# Altium PCB medibox.PcbDoc
Units mm, origin at the board's own origin, x right, y up, seen from the top; angles counter-clockwise.
Board outline 100.33 x 80.01 mm, 4 copper layers (Top Layer, GND, PWR MIX, Bottom Layer), stack 0.603 mm thick; 31 components, 21 nets, 105 pads, 16 vias.
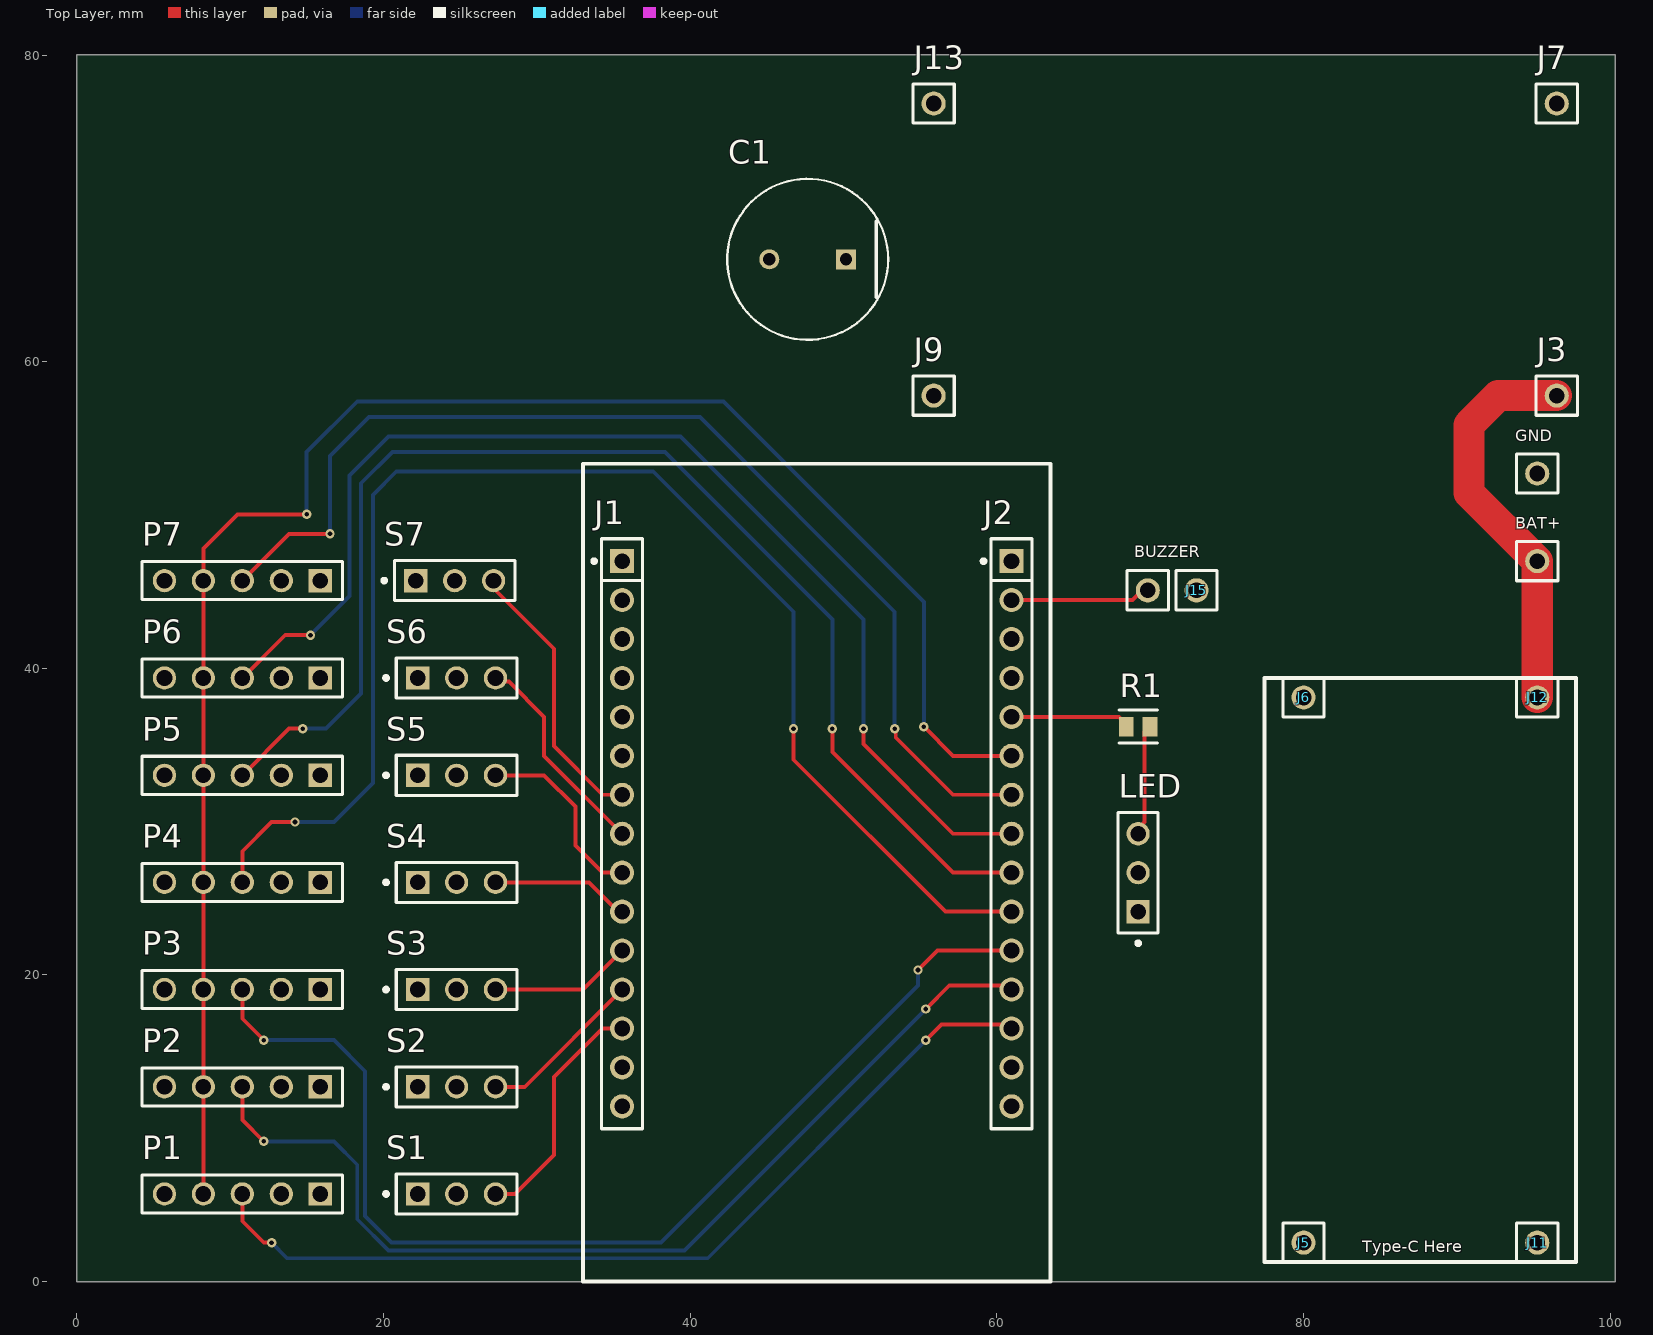
[diagram p0: Top Layer view]
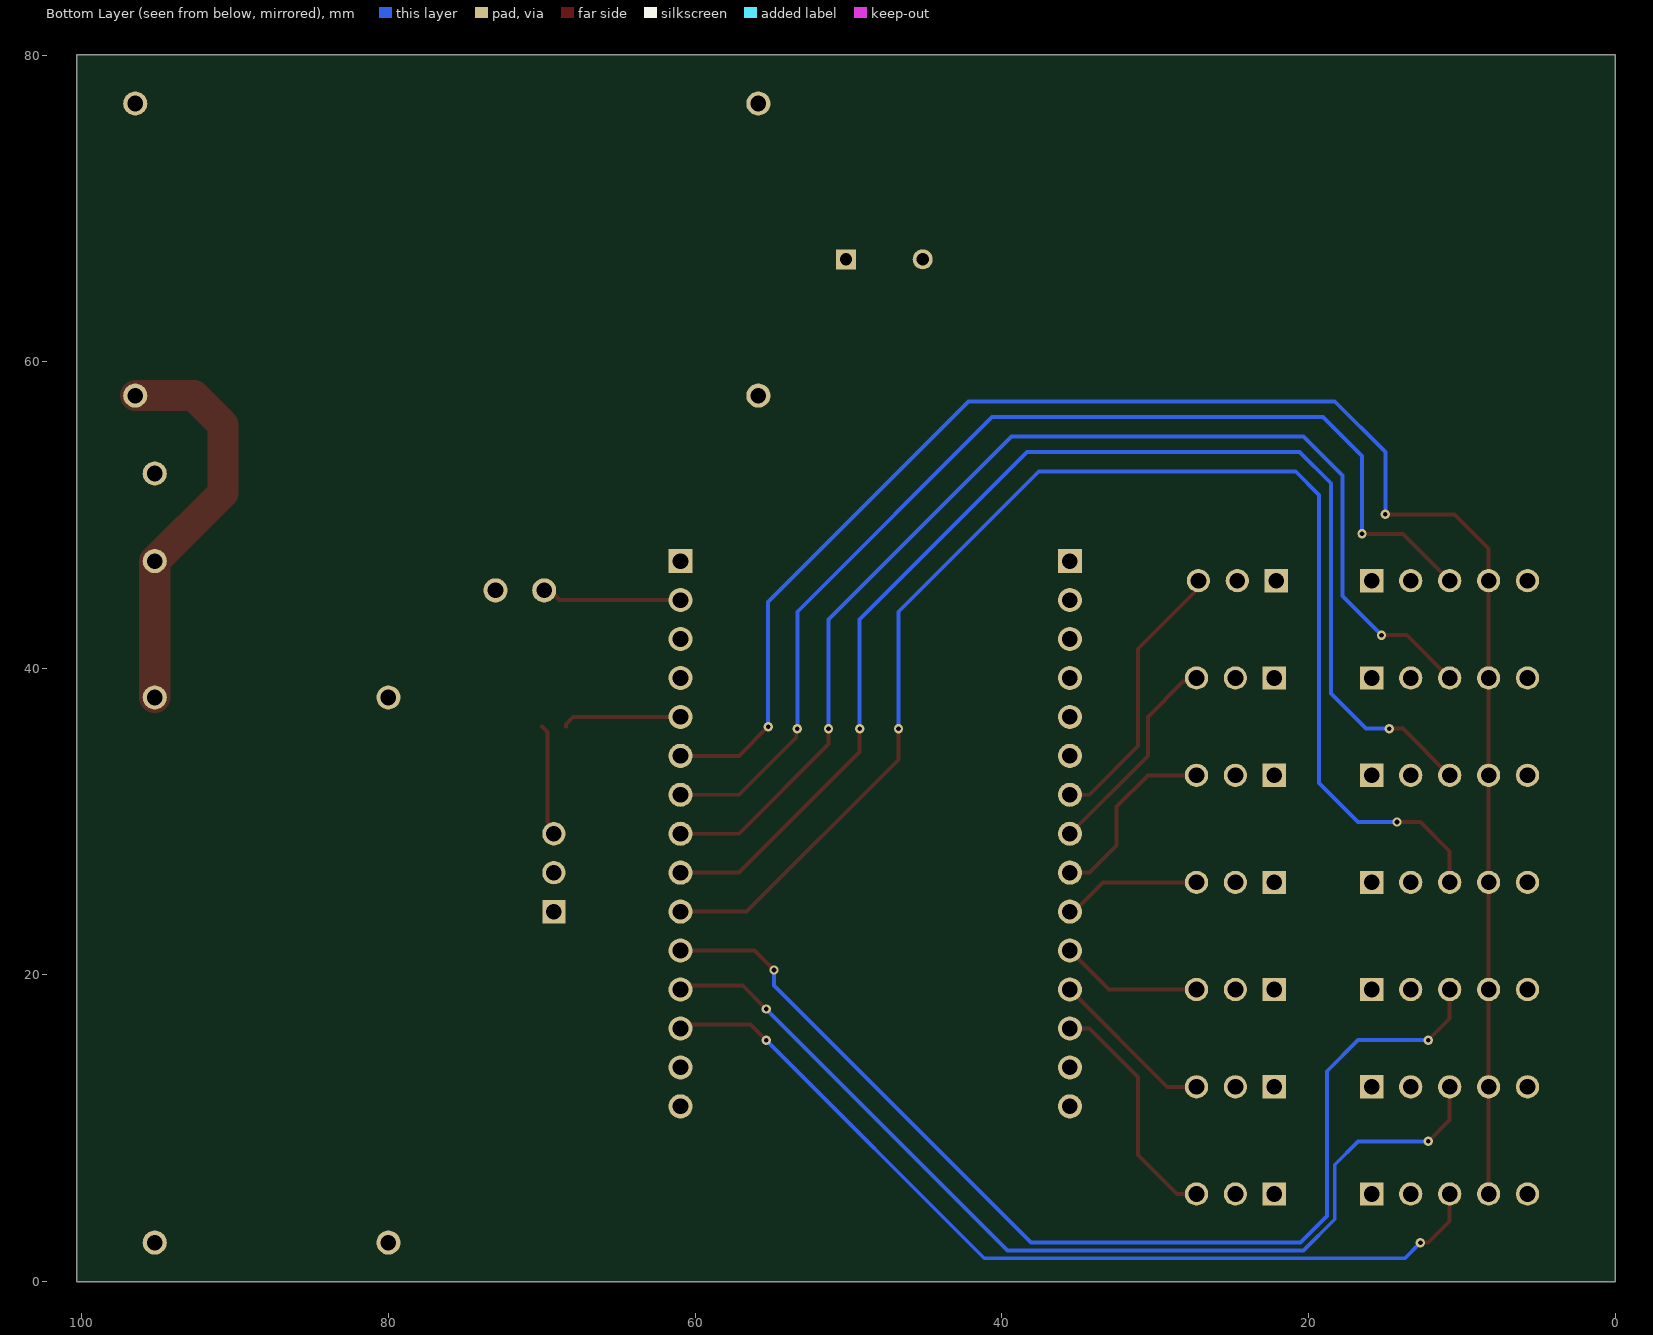
[diagram p1: Bottom Layer view, seen from below]
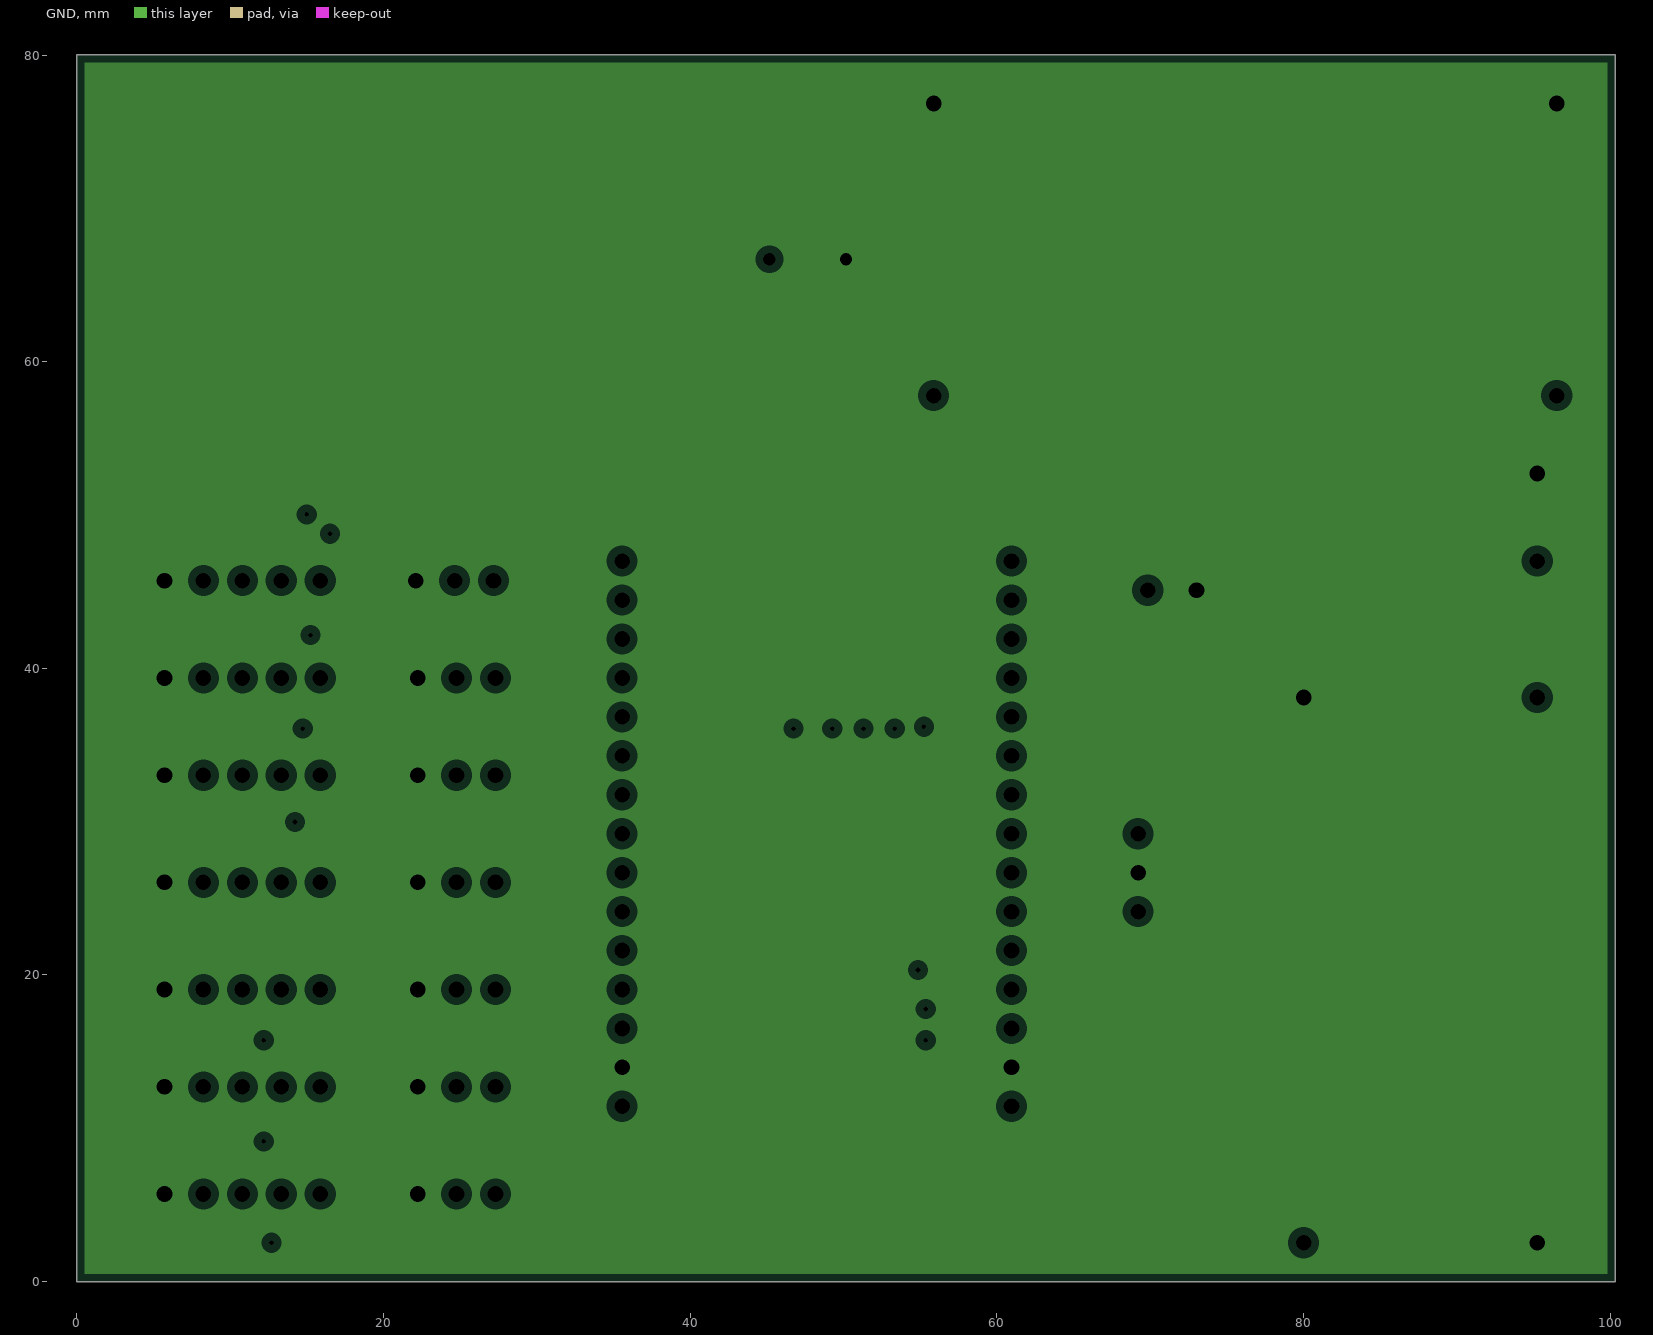
[diagram p2: GND, clearances drawn from the general rule]
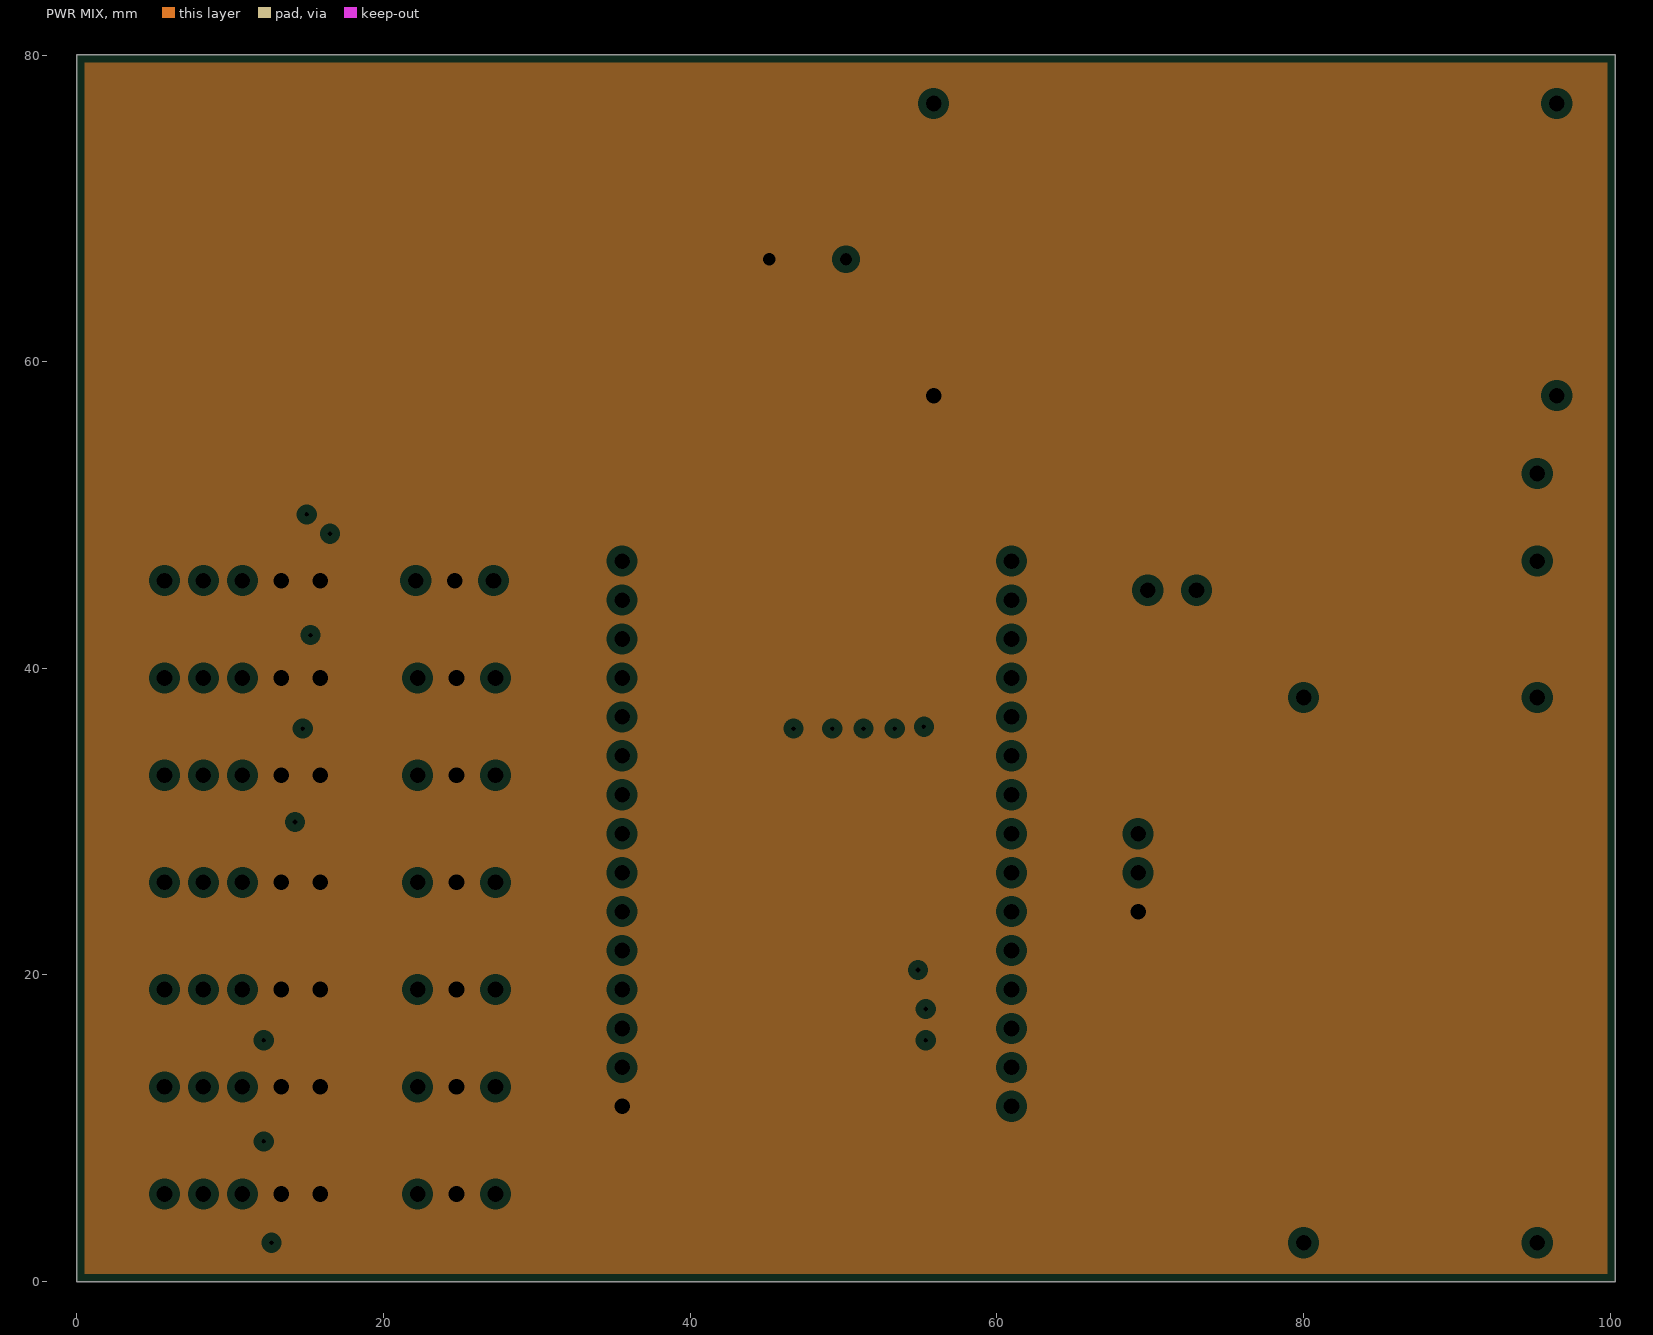
[diagram p3: PWR MIX, clearances drawn from the general rule]
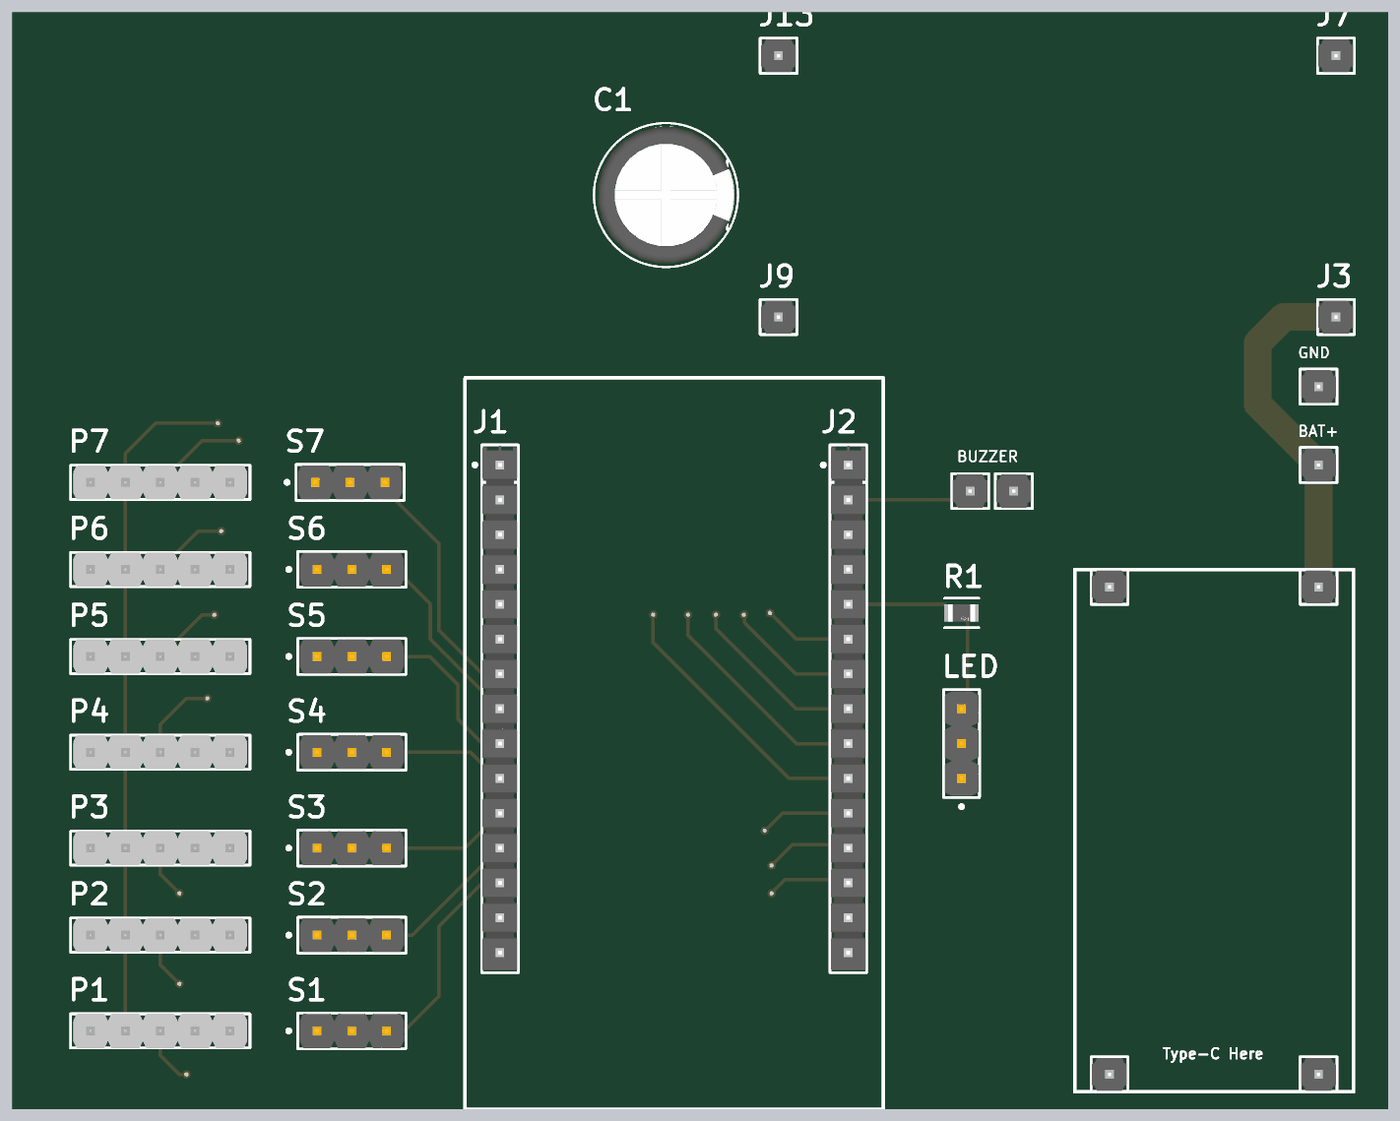
[diagram p4: 3D render of the assembled board from above, using the file's embedded part models]

## Layer stack, top to bottom
Top Solder: solder mask 0.0102, Solder Resist, Dk 3.5
Top Layer: signal copper 0.0356
Dielectric 2: prepreg 0.0711, PP-006, Dk 4.1
GND: plane copper 0.035, net GND
Dielectric 1: dielectric 0.32, FR-4, Dk 4.8
PWR MIX: plane copper 0.035, net 5V
Dielectric 3: prepreg 0.0711, PP-006, Dk 4.1
Bottom Layer: signal copper 0.0356
Bottom Solder: solder mask 0.0102, Solder Resist, Dk 3.5

## Board outline
0,0 100.33,0 100.33,80.01 0,80.01

## Design rules (kind name [scope] priority, off if disabled: settings)
Clearance [All] p1: gap=0.254 ignorepadtopadclearanceinfootprint=FALSE
PlaneClearance [All] p1: clearance=0.508
PlaneConnect [All] p1: planeconnectstyle=Relief reliefexpansion=0.508 reliefentries=4 reliefconductorwidth=0.254 reliefairgap=0.254
PolygonConnect [All] p1: connectstyle=Relief reliefconductorwidth=0.254 reliefentries=4 polygonreliefangle="90 Angle" airgapwidth=0.254
RoutingVias [All] p1: holewidth=0.305 width=0.61 viastyle="Through Hole" minholewidth=0.254 minwidth=0.508 maxholewidth=0.305 maxwidth=0.61
SolderMaskExpansion [All] p1: expansion=0 istentingtop=FALSE
SupplyNets "Schematic Supply Nets" [InNet('GND')] p1: voltage=0.000
Width 5V [(InNet('5V') OR InNet('BAT_7.4V'))] p1: maxlimit=2.032 minlimit=0.762 preferedwidth=1.524
Width [All] p2: maxlimit=0.254 minlimit=0.203 preferedwidth=0.254
28 further rules are at their usual default settings.

## Components (designator, comment, footprint, x,y, rotation, side; value= is the part's Value field where it differs from the comment)
BAT+ "68000-401HLF" FP-68000-401HLF-MFG 95.25,46.99 r0 top (schematic designator J4)
BUZZER "68000-401HLF" FP-68000-401HLF-MFG 69.85,45.085 r0 top (schematic designator J14)
C1 "1000uF" FP-RAD-TH-D_10_0_5-L_25_2-MFG 47.665,66.675 r180 top
GND "68000-401HLF" FP-68000-401HLF-MFG 95.25,52.705 r0 top (schematic designator J10)
J1 "TSW-115-23-T-S" FP-TSW-115-23-T-S-MFG 35.56,29.21 r270 top
J2 "TSW-115-23-T-S" FP-TSW-115-23-T-S-MFG 60.96,29.21 r270 top
J3 "68000-401HLF" FP-68000-401HLF-MFG 96.52,57.785 r0 top
J5 "68000-401HLF" FP-68000-401HLF-MFG 80.01,2.54 r0 top
J6 "68000-401HLF" FP-68000-401HLF-MFG 80.01,38.1 r0 top
J7 "68000-401HLF" FP-68000-401HLF-MFG 96.52,76.835 r0 top
J9 "68000-401HLF" FP-68000-401HLF-MFG 55.88,57.785 r0 top
J11 "68000-401HLF" FP-68000-401HLF-MFG 95.25,2.54 r0 top
J12 "68000-401HLF" FP-68000-401HLF-MFG 95.25,38.1 r0 top
J13 "68000-401HLF" FP-68000-401HLF-MFG 55.88,76.835 r0 top
J15 "68000-401HLF" FP-68000-401HLF-MFG 73.025,45.085 r0 top
LED "MTLW-103-07-G-S-230" FP-MTLW-103-07-G-S-230-MFG 69.215,26.67 r90 top (schematic designator J8)
P1 "MTLW-105-05-T-S-190" SMTC-MTLW-105-05-X-S-190 15.875,5.715 r180 top
P2 "MTLW-105-05-T-S-190" SMTC-MTLW-105-05-X-S-190 15.875,12.7 r180 top
P3 "MTLW-105-05-T-S-190" SMTC-MTLW-105-05-X-S-190 15.875,19.05 r180 top
P4 "MTLW-105-05-T-S-190" SMTC-MTLW-105-05-X-S-190 15.875,26.035 r180 top
P5 "MTLW-105-05-T-S-190" SMTC-MTLW-105-05-X-S-190 15.875,33.02 r180 top
P6 "MTLW-105-05-T-S-190" SMTC-MTLW-105-05-X-S-190 15.875,39.37 r180 top
P7 "MTLW-105-05-T-S-190" SMTC-MTLW-105-05-X-S-190 15.875,45.72 r180 top
R1 "330R" FP-RMCF0805-IPC_C 69.215,36.195 r0 top
S1 "MTLW-103-07-G-S-230" FP-MTLW-103-07-G-S-230-MFG 24.765,5.715 r0 top
S2 "MTLW-103-07-G-S-230" FP-MTLW-103-07-G-S-230-MFG 24.765,12.7 r0 top
S3 "MTLW-103-07-G-S-230" FP-MTLW-103-07-G-S-230-MFG 24.765,19.05 r0 top
S4 "MTLW-103-07-G-S-230" FP-MTLW-103-07-G-S-230-MFG 24.765,26.035 r0 top
S5 "MTLW-103-07-G-S-230" FP-MTLW-103-07-G-S-230-MFG 24.765,33.02 r0 top
S6 "MTLW-103-07-G-S-230" FP-MTLW-103-07-G-S-230-MFG 24.765,39.37 r0 top
S7 "MTLW-103-07-G-S-230" FP-MTLW-103-07-G-S-230-MFG 24.638,45.72 r0 top

## Footprints (in the part's own frame and the unit in brackets; to place one, negate y for a bottom-side part, rotate by r counter-clockwise, add the part's x,y. Pads: shape width x height; smd on the part's side, far side on the other; paste and mask are expansions set on the pad)
FP-68000-401HLF-MFG [mm]
  round 1.57 hole 1.02 paste-2539.97 mask+0: 1(0,0)
  silkscreen extent -1.35,-1.28 1.35,1.28, body extent -1.45,-1.38 1.45,1.38, height 0.25
FP-MTLW-103-07-G-S-230-MFG [mm]
  rect 1.52x1.52 hole 1.02 paste-2539.97 mask+0: 1(-2.54,0)
  round 1.52 hole 1.02 paste-2539.97 mask+0: 2(0,0) 3(2.54,0)
  silkscreen extent -4.72,-1.31 3.94,1.31, body extent -4.04,-1.41 4.04,1.41, height 0.25
FP-RAD-TH-D_10_0_5-L_25_2-MFG [mm]
  rect 1.3x1.3 hole 0.8 paste-2539.97 mask+0: 1(-2.5,0)
  round 1.3 hole 0.8 paste-2539.97 mask+0: 2(2.5,0)
  silkscreen extent -5.25,-5.25 5.25,5.25, body extent -5.35,-5.35 5.35,5.35, height 0.25
FP-RMCF0805-IPC_C [mm]
  rect 0.955x1.262 smd paste+0 mask+0: 1(-0.776,0) 2(0.776,0)
  silkscreen extent -1.25,-1.07 1.25,1.07, body extent -1.35,-0.77 1.35,0.77, height 0.25
FP-TSW-115-23-T-S-MFG [mm]
  rect 1.57x1.57 hole 1.02 paste-2539.97 mask+0: 1(-17.78,0)
  round 1.57 hole 1.02 paste-2539.97 mask+0: 2(-15.24,0) 3(-12.7,0) 4(-10.16,0) 5(-7.62,0) 6(-5.08,0) 7(-2.54,0) 8(0,0) 9(2.54,0) 10(5.08,0) 11(7.62,0) 12(10.16,0) 13(12.7,0) 14(15.24,0) 15(17.78,0)
  silkscreen extent -19.24,-1.95 19.24,1.34, body extent -19.34,-1.44 19.34,1.44, height 0.25
SMTC-MTLW-105-05-X-S-190 [mm] "Terminal Assembly, 1x5 Pins, Vertical, 2.54mm Pitch, Male"
  rect 1.52x1.52 hole 1.02: 1(0,0)
  round 1.52 hole 1.02: 2(2.54,0) 3(5.08,0) 4(7.62,0) 5(10.16,0)
  silkscreen extent -1.46,-1.24 11.62,1.24, body extent -1.27,-1.24 11.43,1.24, height 6.35

## Part data
BAT+ BUZZER GND J3 J5 J6 J7 J9 J11 J12 J13 J15: library part CMP-15126-126518178-1, "68000-401HLF Conn Unshrouded Header HDR 1 POS Solder ST Top Entry Thru-Hole BergStik® Bulk", Color=Black, Current Rating=3A, Insulation Resistance=5GΩ, Max Operating Temperature=125°C, Max Voltage Rating (AC)=1.5kV, Min Operating Temperature=-65°C, Voltage Rating=110V, Connector Type="Male Pin", Contact Gender=Male, Contact Material="Bronze, Nickel, Tin", Contact Mating Length=5.842mm, Contact Plating=Tin, Depth=2.41mm, Gender=Male, Height=8.79mm, Housing Color=Black, Housing Material=Thermoplastic, Lead Length=2.41mm, Lead Pitch=2.54mm, Length=2.54mm, Mating Post Length=5.84mm, Mount="Through Hole", NexarPartId=126518178, Number of Contacts=1, Number of Pins=1, Number of Positions=1, Number of Rows=1, Orientation=Straight, Packaging=Bulk, Pitch=2.54mm, Radiation Hardening=No, RoHS=Compliant, Schedule B="8535908040, 8535908040", Termination=Solder
C1: library part CMP-05427-002159-1, "EEUFC1C102B Aluminum Electrolytic Capacitors (Radial Lead Type) AEC-Q200 Qualified 1000uF ±20% 16V", Capacitance=1mF, Case/Package=Radial, ESR (Equivalent Series Resistance)=45mR, Max Operating Temperature=105°C, Min Operating Temperature=-55°C, Package Quantity=500, Ratings=AEC-Q200, Ripple Current=1.44A, Tolerance=20%, Voltage Rating=16V, Diameter=10mm, Height=25mm, Height - Seated (Max)=1.063inch, Impedance=45mR, Lead Diameter=0.6mm, Lead Pitch=5mm, Length=25mm, Life (Hours)=3000Hour, Mount="Through Hole", Packaging="Ammo Pack", Polarity=Polar, Radiation Hardening=No, RoHS Compliant=Yes, Series=FC, Termination=Radial, Voltage Rating (DC)=16V
J1 J2: library part CMP-02766-001466-1, "CONN HEADER VERT 15POS 2.54MM", Color=Black, Connector Type="Male Pin", Contact Material=Bronze, Contact Mating Length=0.23inch, Contact Plating=Tin, Contact Type="Male Pin", Gender=Male, Height=2.54mm, Housing Color=Black, Housing Material=Plastic, Lead Free="Lead Free", Length=38.1mm, Mount="Through Hole", Number of Contacts=15, Number of Positions=15, Number of Rows=1, Packaging=Bulk, Pitch=0.1inch, Radiation Hardening=No, REACH SVHC="No SVHC", RoHS Compliant=Yes, Series=TSW, Termination=Solder, Width=2.54mm
LED S1 S2 S3 S4 S5 S6 S7: library part CMP-02766-001679-1, "CONN HEADER VERT 3POS 2.54MM", Housing Color=Black, Max Current Rating=3A, Max Operating Temperature=125°C, Min Operating Temperature=-55°C, Contact Material=Bronze, Contact Plating=Gold, Depth=2.48mm, Gender=Male, Housing Material=Polymer, Length=7.62mm, Number of Contacts=3, Number of Rows=1, Orientation=Straight, Packaging=Bulk, Pitch=2.54mm, Radiation Hardening=No, RoHS Compliant=Yes, Termination=Solder
P1 P2 P3 P4 P5 P6 P7: library part CMP-1024-00077-1, "Low Profile .025\" SQ Post Header, Through-hole, Vertical, -55 to 105 degC, 2.54 mm Pitch, 5-Pin, Male, RoHS", Manufacturer=Samtec, Temperature Range="-55 to 105 degC", ComponentLink1Description="Manufacturer URL", ComponentLink1URL=http://www.samtec.com, ComponentLink2Description=Datasheet, ComponentLink2URL=http://www.samtec.com/documents/webfiles/pdf/MTLW_TH.PDF, ComponentLink3Description="Package Specification", ComponentLink3URL=http://www.samtec.com/documents/webfiles/cpdf/MTLW-1XX-XX-XX-X-XXX-XX-XX-MKT1.pdf, DatasheetVersion=F-214, Mounting Technology=Through-hole, Orientation=Vertical, PackageDescription="Low Profile Terminal Assembly", PackageReference=MTLW-105-05-X-S-190, PackageVersion="T, 6/1991", PartNumber=MTLW-105-05-T-S-190, Pitch="2.54 mm", RoHS=True
R1: library part CMP-26527-000132-1, "RMCF0805FT330R 330Ω ±1% 0.125W 0805 Thick Film Chip Resistor AEC-Q200 compliant", Case Code (Imperial)=0805, Case Code (Metric)=2012, Max Operating Temperature=155°C, Max Power Dissipation=125mW, Min Operating Temperature=-55°C, Resistor Type="Thick Film", Temperature Coefficient=100ppm/°C, Tolerance=1%, Case/Package=0805, Construction=Rectangular, Contact Plating=Tin, Depth=1.25mm, Features="Automotive AEC-Q200", Height=0.026inch, Lead Free="Lead Free", Length=0.079inch, Military Standard=Not, Mount="Surface Mount", Number of Terminations=2, Packaging="Tape and Reel", Radiation Hardening=No, Resistance=330R, RoHS Compliant=Yes, Series=RMCF, Width=0.049inch

## Via types
v1: diameter 0.61, hole 0.305, Top Layer to Bottom Layer, tented both sides, 16 vias

## Nets (pads, with @x,y where several pads share a name; then routed paths per layer and width w, separated by ;. In a path a pad name is that pad's centre, name@x,y a point inside that pad or via, vN(x,y) a via of type N, cw(c..) or ccw(c..) an arc to the next point about the centre after c; other vN are vias at no path point)
5V: C1.2 J1.15 J9.1 LED.1 P1.1 P1.2 P2.1 P2.2 P3.1 P3.2 P4.1 P4.2 P5.1 P5.2 P6.1 P6.2 P7.1 P7.2 S1.2 S2.2 S3.2 S4.2 S5.2 S6.2 S7.2
BAT_7.4V: BAT+.1 J3.1 J12.1 | length 26.1
  Top Layer w2.032: J12.1 BAT+.1 90.805,51.435 90.805,55.88 92.71,57.785 J3.1@96.508,57.785
DT1: J2.13 P1.3 | length 59.4
  Top Layer w0.254: P1.3 10.795,3.937 12.192,2.54 v1(12.7,2.54) ; v1(55.372,15.748) 56.388,16.764 60.153,16.764 60.155,16.762 60.708,16.762 J2.13
  Bottom Layer w0.254: v1(12.7,2.54) 13.716,1.524 41.148,1.524 v1(55.372,15.748)
DT2: J2.12 P2.3 | length 65.2
  Top Layer w0.254: P2.3 10.795,10.541 v1(12.192,9.144) ; v1(55.372,17.78) 56.896,19.304 60.153,19.304 60.155,19.302 60.708,19.302 J2.12
  Bottom Layer w0.254: v1(12.192,9.144) 16.764,9.144 18.288,7.62 18.288,4.064 20.32,2.032 39.624,2.032 v1(55.372,17.78)
DT3: J2.11 P3.3 | length 72.1
  Top Layer w0.254: P3.3 10.795,17.145 v1(12.192,15.748) ; v1(54.864,20.32) 56.134,21.59 J2.11
  Bottom Layer w0.254: v1(12.192,15.748) 16.764,15.748 18.796,13.716 18.796,4.274 20.53,2.54 38.1,2.54 54.864,19.304 v1(54.864,20.32)
DT4: J2.10 P4.3 | length 91
  Top Layer w0.254: P4.3 10.795,28.067 12.7,29.972 v1(14.224,29.972) ; v1(46.736,36.068) 46.736,34.036 56.642,24.13 J2.10
  Bottom Layer w0.254: v1(14.224,29.972) 16.764,29.972 19.304,32.512 19.304,51.308 20.828,52.832 37.592,52.832 46.736,43.688 v1(46.736,36.068)
DT5: J2.9 P5.3 | length 83.4
  Top Layer w0.254: P5.3 13.843,36.068 v1(14.732,36.068) ; v1(49.276,36.068) 49.276,34.544 57.15,26.67 J2.9
  Bottom Layer w0.254: v1(14.732,36.068) 16.256,36.068 18.542,38.354 18.542,52.07 20.574,54.102 38.354,54.102 49.276,43.18 v1(49.276,36.068)
DT6: J2.8 P6.3 | length 76.8
  Top Layer w0.254: P6.3 13.589,42.164 v1(15.24,42.164) ; v1(51.308,36.068) 51.308,35.052 57.15,29.21 J2.8
  Bottom Layer w0.254: v1(15.24,42.164) 17.78,44.704 17.78,52.578 20.32,55.118 39.37,55.118 51.308,43.18 v1(51.308,36.068)
DT7: J2.7 P7.3 | length 72.5
  Top Layer w0.254: P7.3 13.843,48.768 v1(16.51,48.768) ; v1(53.34,36.068) 53.408,36 53.408,35.492 57.15,31.75 J2.7
  Bottom Layer w0.254: v1(16.51,48.768) 16.51,53.848 19.05,56.388 40.64,56.388 53.34,43.688 v1(53.34,36.068)
GND: C1.1 GND.1 J1.14 J2.14 J6.1 J7.1 J11.1 J13.1 J15.1 LED.2 P1.5 P2.5 P3.5 P4.5 P5.5 P6.5 P7.5 S1.1 S2.1 S3.1 S4.1 S5.1 S6.1 S7.1
LED: LED.3 R1.2 | length 7.3
  Top Layer w0.254: LED.3 69.215,29.553 69.64,29.978 69.64,35.845 R1.2
NetJ2_2: BUZZER.1 J2.2 | length 9.2
  Top Layer w0.254: J2.2 68.859,44.45 69.494,45.085 BUZZER.1
NetJ2_5: J2.5 R1.1 | length 7.8
  Top Layer w0.254: J2.5 67.958,36.83 68.439,36.349 R1.1
PWM1: J1.13 S1.3 | length 15.7
  Top Layer w0.254: S1.3 28.575,5.715 31.115,8.255 31.115,13.335 34.29,16.51 J1.13
PWM2: J1.12 S2.3 | length 10.9
  Top Layer w0.254: S2.3 29.21,12.7 J1.12
PWM3: J1.11 S3.3 | length 9.3
  Top Layer w0.254: S3.3 33.02,19.05 J1.11
PWM4: J1.10 S4.3 | length 9
  Top Layer w0.254: S4.3 33.401,26.035 35.306,24.13 J1.10
PWM5: J1.9 S5.3 | length 12.4
  Top Layer w0.254: S5.3 30.48,33.02 32.512,30.988 32.512,28.448 34.29,26.67 J1.9
PWM6: J1.8 S6.3 | length 14
  Top Layer w0.254: S6.3 27.54,39.135 28.175,39.135 30.48,36.83 30.48,34.29 J1.8
PWM7: J1.7 S7.3 | length 18.4
  Top Layer w0.254: S7.3@26.67,45.72 31.115,41.275 31.115,34.925 34.29,31.75 J1.7
SCK: J2.6 P1.4 P2.4 P3.4 P4.4 P5.4 P6.4 P7.4 | length 115.5
  Top Layer w0.254: P1.4 P2.4 P3.4 P4.4 P5.4 P6.4 P7.4 8.255,47.805 10.488,50.038 v1(14.986,50.038) ; v1(55.245,36.195) 57.15,34.29 J2.6
  Bottom Layer w0.254: v1(14.986,50.038) 14.986,54.102 18.288,57.404 42.164,57.404 55.245,44.323 v1(55.245,36.195)
pads on no net: J1.1 J1.2 J1.3 J1.4 J1.5 J1.6 J2.1 J2.3 J2.4 J2.15 J5.1

## Polygon pours and split planes (outlines as drawn)
GND on GND (split plane): 99.82,0.51 0.51,0.51 0.51,79.5 99.82,79.5
5V on PWR MIX (split plane): 99.82,0.51 0.51,0.51 0.51,79.5 99.82,79.5

## Silkscreen, mask and mechanical layers (free items; w line width, h text height)
Top Overlay:
  lines w0.254: 33.02,0 63.5,0 63.5,53.34 33.02,53.34 33.02,0 ; 77.47,1.27 97.79,1.27 97.79,39.37 77.47,39.37 77.47,1.27
  text "Type-C Here" at 83.82,1.905 h0.76